# Altium PCB Attempt1-ADC.PcbDoc (part 1 of 2)
Units mil, origin at the board's own origin, x right, y up, seen from the top; angles counter-clockwise.
Board outline 2118.52 x 1463.27 mil, 4 copper layers (Top Layer, GND Layer 2, PWR Layer 3, Bottom Layer), stack 65.52 mil thick; 32 components, 24 nets, 127 pads, 323 vias.
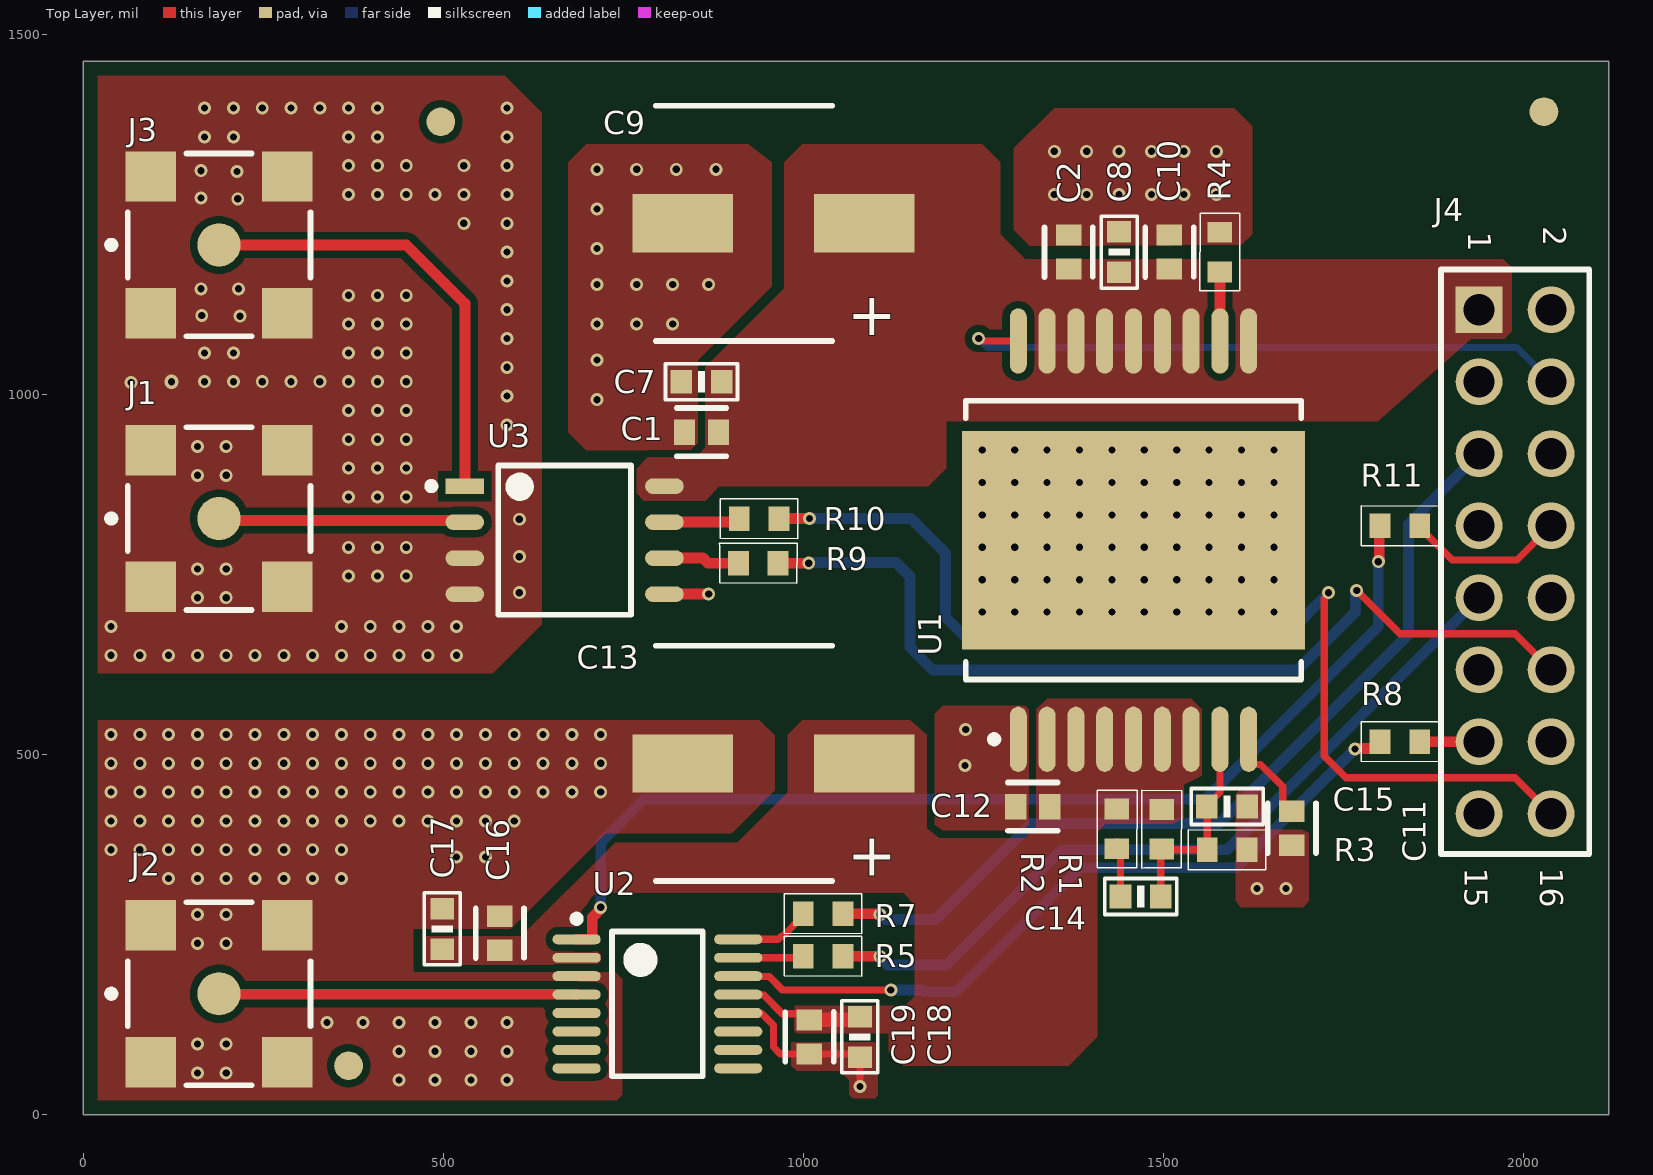
[diagram p0: Top Layer view]
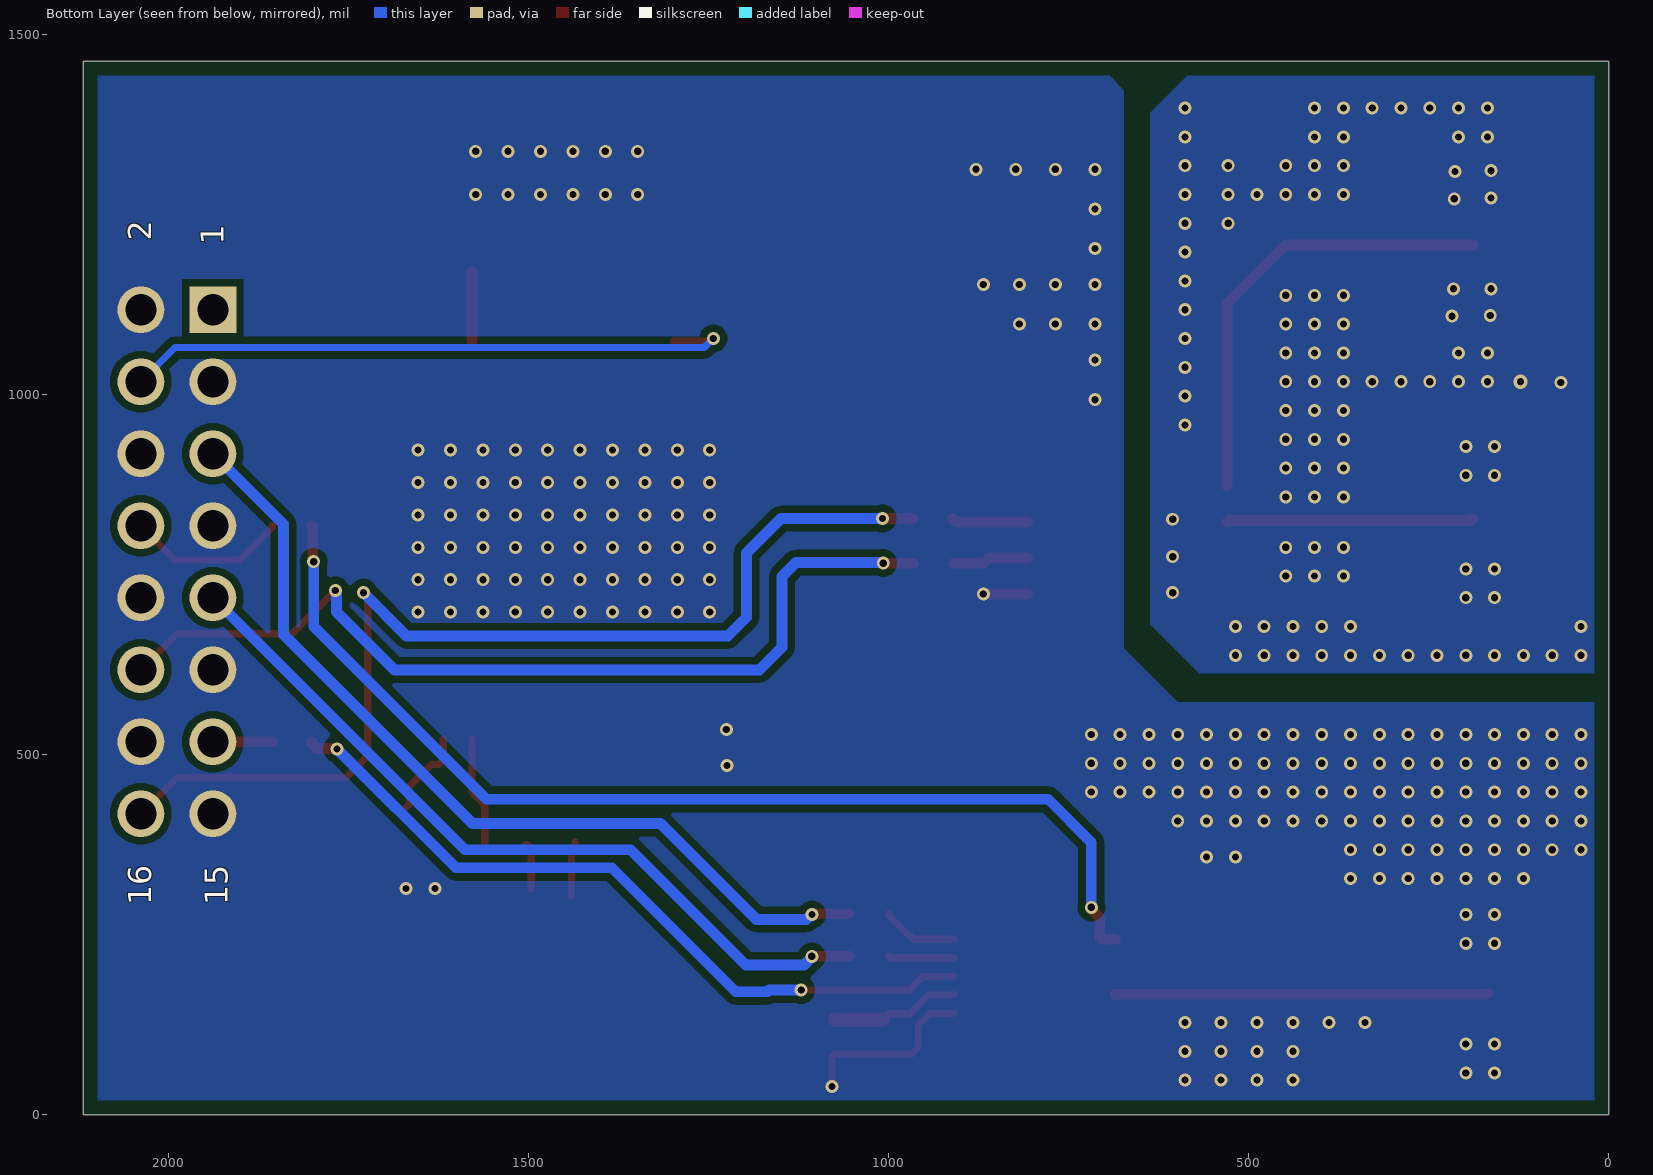
[diagram p1: Bottom Layer view, seen from below]
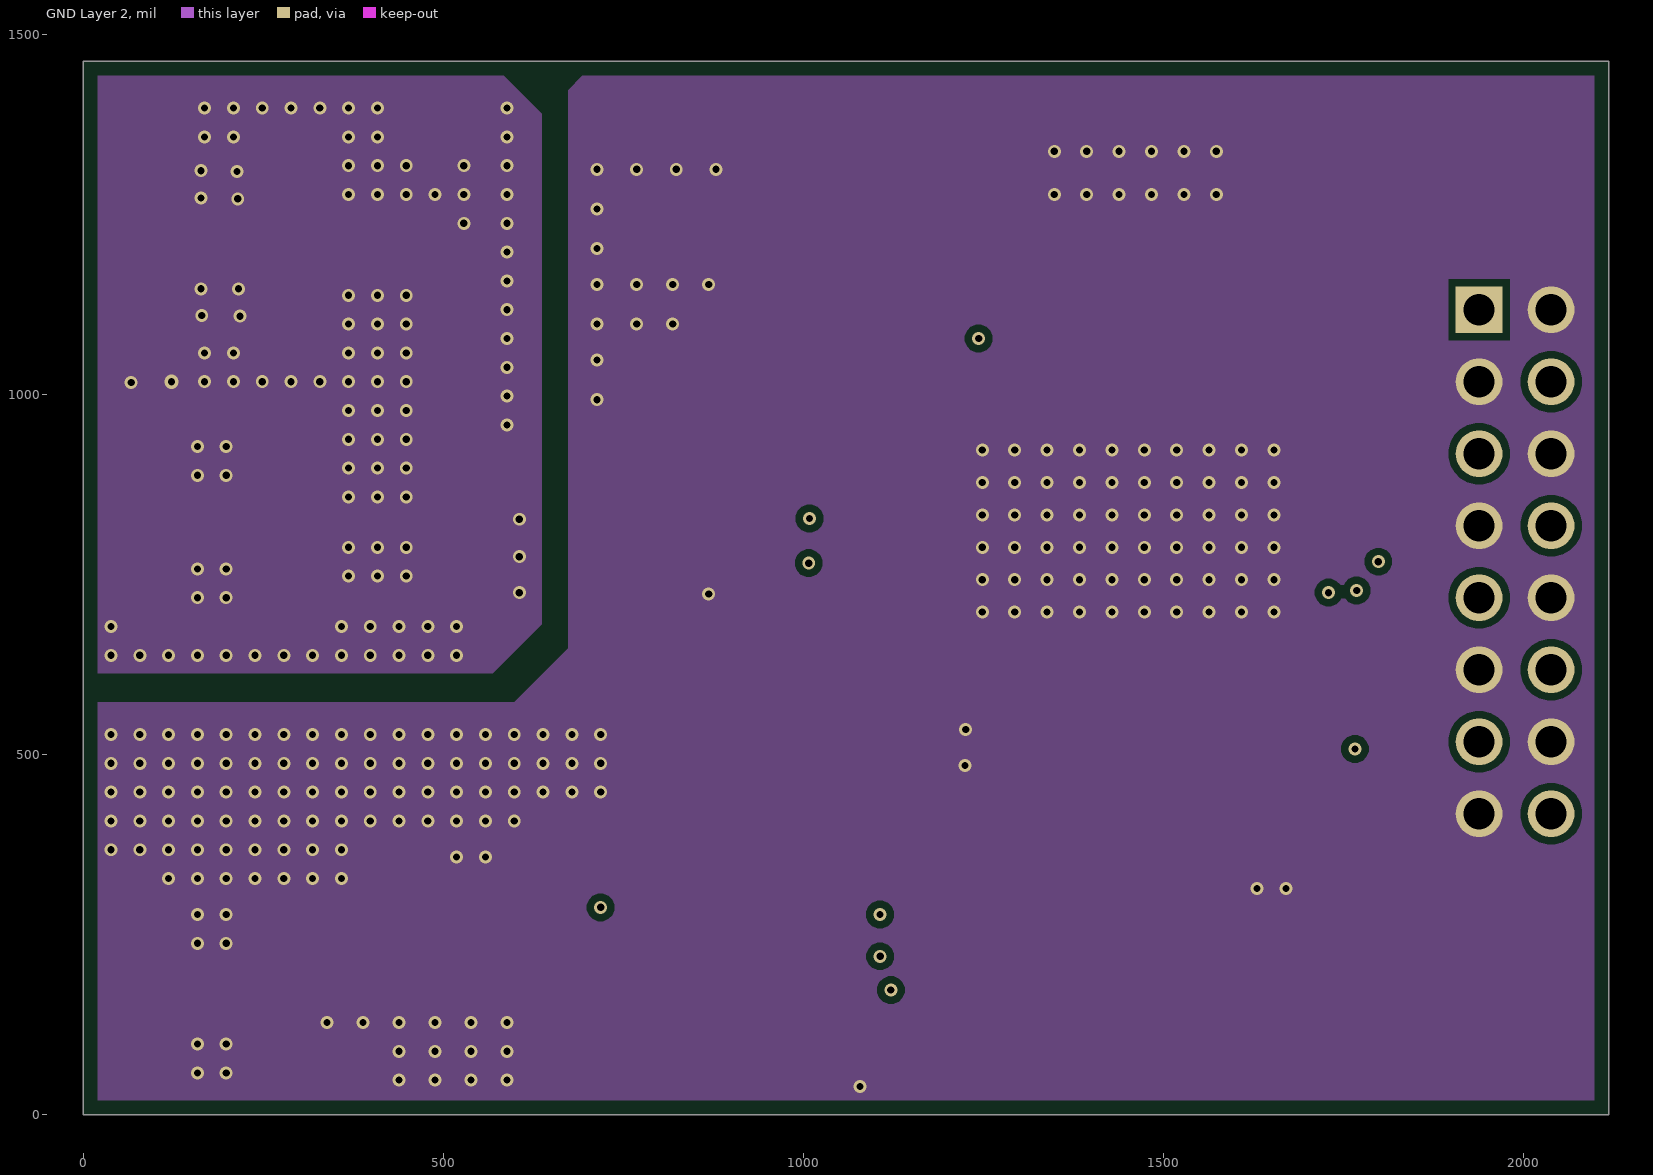
[diagram p2: GND Layer 2]
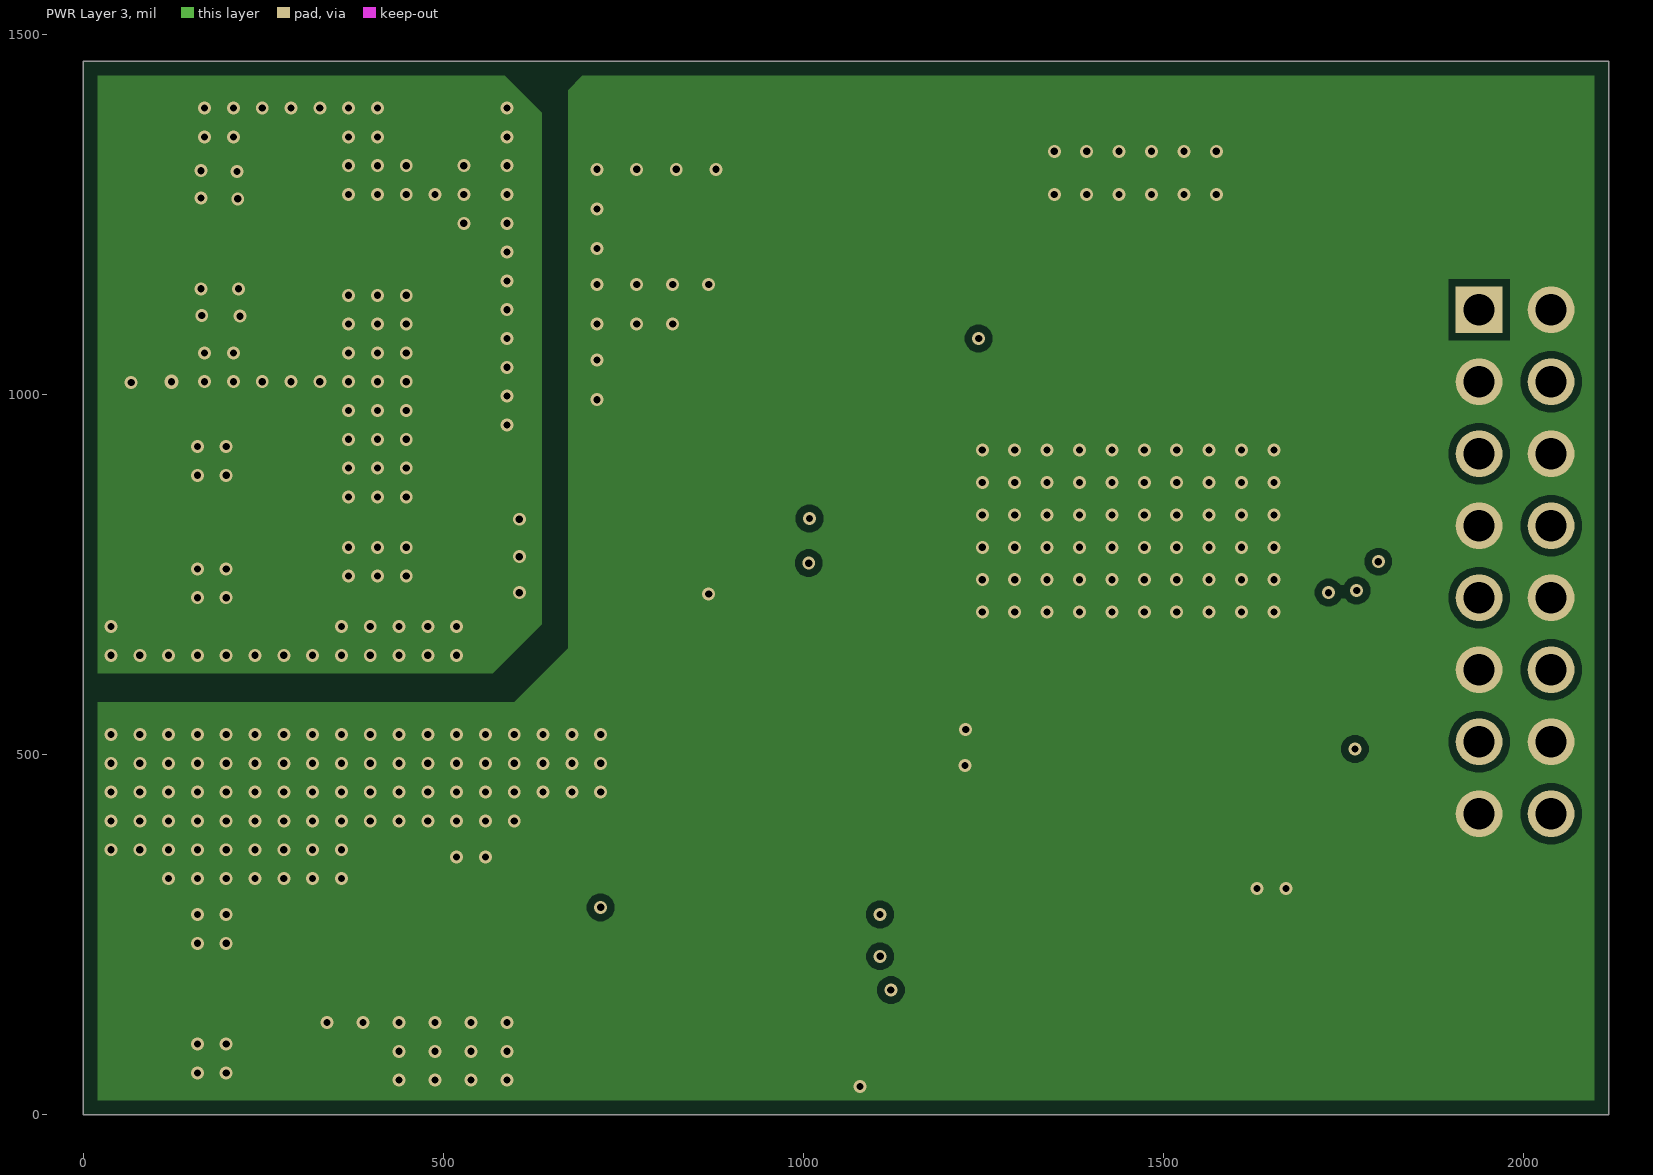
[diagram p3: PWR Layer 3]
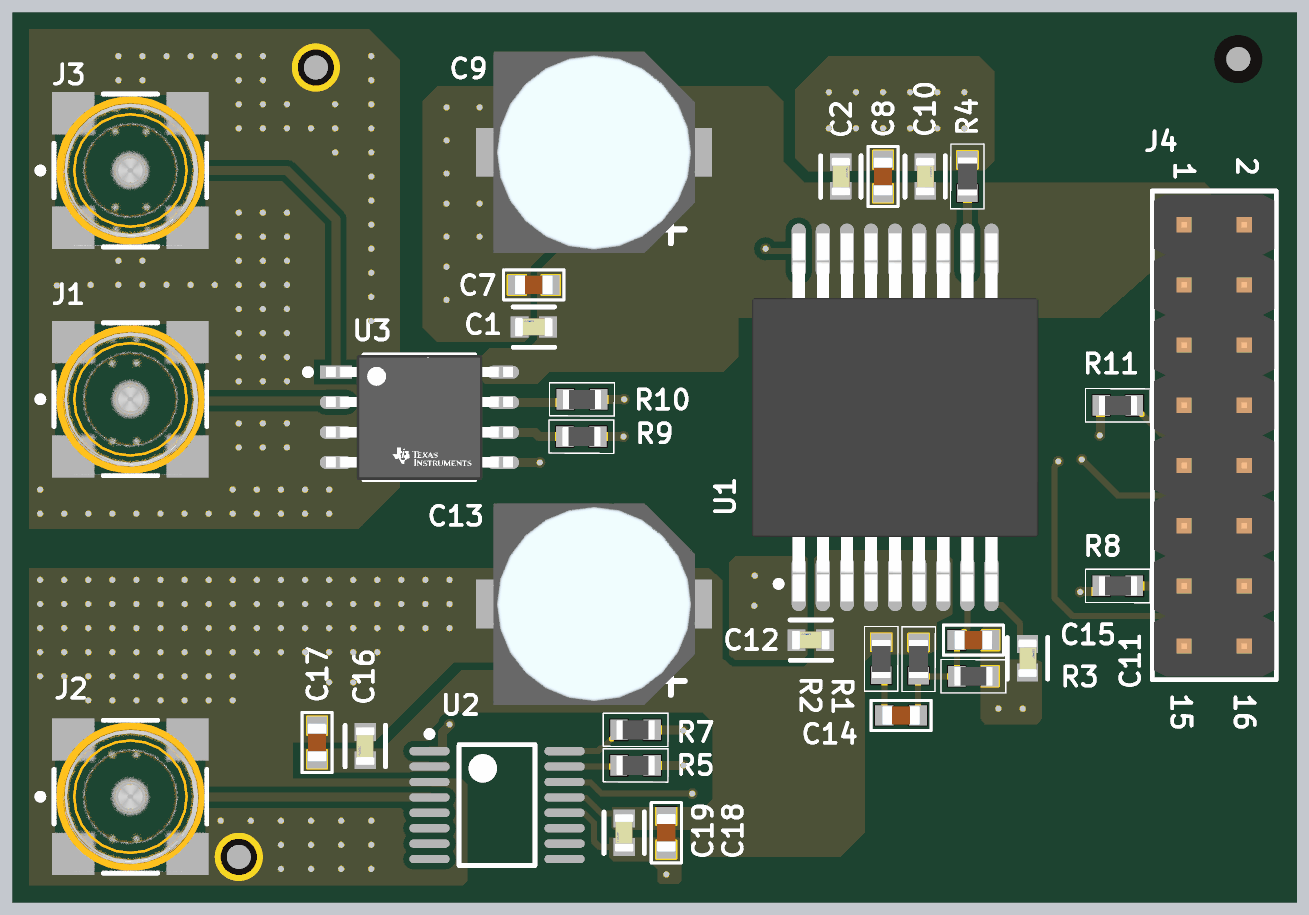
[diagram p5: 3D render of the assembled board from above, using the file's embedded part models]

## Layer stack, top to bottom
Top Solder: solder mask 0.4, Solder Resist, Dk 3.5
Top Layer: signal copper 1.378
Dielectric 2: prepreg 8.2835, PP-006, Dk 4.1
GND Layer 2: signal copper 0.5984
Dielectric 1: dielectric 45, FR-4, Dk 4.8
PWR Layer 3: signal copper 0.5984
Dielectric 3: prepreg 8.2835, PP-006, Dk 4.1
Bottom Layer: signal copper 1.378
Bottom Solder: solder mask 0.4, Solder Resist, Dk 3.5

## Board outline
0,0 2118.52,0 2118.52,1463.27 0,1463.27

## Design rules (kind name [scope] priority, off if disabled: settings)
BoardOutlineClearance [All] p1: gap=20 ignorepadtopadclearanceinfootprint=FALSE
Clearance [All] p1: gap=10 ignorepadtopadclearanceinfootprint=TRUE except(0: Arc-Hole Track-Hole SMDPad-Hole THPad-Hole Via-Hole Fill-Hole Poly-Hole Region-Hole Text-Hole)
ComponentClearance [All] p1: gap=10 collisioncheckmode=3 verticalgap=78.74 showdistances=FALSE checkcomponentboundary=TRUE
Creepage [All] p1: checkdistance=78.74
HoleSize [All] p1: absolutevalues=TRUE maxlimit=90000 minlimit=10 maxpercent=80.000 minpercent=20.000
MinimumSolderMaskSliver [All] p1: minsoldermaskwidth=3.5
PlaneConnect [All] p1: planeconnectstyle=Direct reliefexpansion=20 reliefentries=4 reliefconductorwidth=10 reliefairgap=10
PolygonConnect [All] p1: connectstyle=Direct reliefconductorwidth=10 reliefentries=4 polygonreliefangle="90 Angle" airgapwidth=10
RoutingVias [All] p1: holewidth=30 width=50 viastyle="Through Hole" minholewidth=30 minwidth=50 maxholewidth=30 maxwidth=50
SilkToSolderMaskClearance [IsPad] p1: minsilkscreentomaskgap=4.4 clearancetoexposedcopper=TRUE
SolderMaskExpansion [isvia] p1: expansion=4 istentingtop=TRUE
UnRoutedNet [All] p1: checkbadconnections=TRUE
Width [All] p1: maxlimit=50 minlimit=10 preferedwidth=10
24 further rules are at their usual default settings.

## Components (designator, comment, footprint, x,y, rotation, side; value= is the part's Value field where it differs from the comment)
C1 "0.10 μF" FP-C0603C-CF-MFG 858.52,948.27 r0 top
C2 "0.10 μF" FP-C0603C-CF-MFG 1368.52,1198.27 r270 top
C7 "10uF" CAPC1608X90N 858.52,1018.27 r180 top
C8 "10uF" CAPC1608X90N 1438.52,1198.27 r90 top
C9 "220uF/25V" CAP_AE830X1050N 958.52,1238.27 r180 top
C10 "0.10 μF" FP-C0603C-CF-MFG 1508.52,1198.27 r270 top
C11 "0.10 μF" FP-C0603C-CF-MFG 1678.52,398.27 r270 top
C12 "0.10 μF" FP-C0603C-CF-MFG 1318.52,428.27 r0 top
C13 "220uF/25V" CAP_AE830X1050N 958.52,488.27 r180 top
C14 "4.7nF" CAPC1608X90N 1468.52,303.27 r0 top
C15 "100pF" CAPC1608X90N 1588.52,428.27 r0 top
C16 "0.10 μF" FP-C0603C-CF-MFG 578.52,252.32 r90 top
C17 "1uF" CAPC1608X90N 498.52,258.27 r90 top
C18 "1uF" CAPC1608X90N 1078.52,108.27 r90 top
C19 "0.10 μF" FP-C0603C-CF-MFG 1008.52,108.27 r90 top
J1 "73251-1350" FP-73251-1350-MFG 188.52,828.27 r0 top
J2 "73251-1350" FP-73251-1350-MFG 188.52,168.27 r0 top
J3 "73251-1350" FP-73251-1350-MFG 188.52,1208.27 r0 top
J4 "61301621121" 61301621121 1988.52,768.27 r270 top
R1 "4.32K" RESC1608X55N 1497.52,396.83 r90 top
R2 "2.67K" RESC1608X55N 1435.52,397.27 r90 top
R3 "806R" RESC1608X55N 1588.52,368.27 r180 top
R4 "511R" RESC1608X55N 1578.52,1198.27 r270 top
R5 "22R" RESC1608X55N 1027.52,220.27 r0 top
R7 "22R" RESC1608X55N 1027.52,279.27 r0 top
R8 "22R" RESC1608X55N 1828.52,518.27 r0 top
R9 "22R" RESC1608X55N 937.52,766.27 r0 top
R10 "22R" RESC1608X55N 938.52,828.27 r0 top
R11 "22R" RESC1608X55N 1828.52,818.27 r180 top
U1 "ISL75051ASEHVFE" CFP102P1520X310-18AN 1458.52,798.27 r90 top
U2 "ADC128S102CIMTX" MTC16_N 797.37,154.29 r0 top
U3 "AMC1203BPSA" FP-PSA0008A-IPC_C 668.52,798.27 r0 top

## Footprints (in the part's own frame and the unit in brackets; to place one, negate y for a bottom-side part, rotate by r counter-clockwise, add the part's x,y. Pads: shape width x height; smd on the part's side, far side on the other; paste and mask are expansions set on the pad)
61301621121 [mm] "Pin Header, pitch 2.54 mm, THT, Vertical, dual row, 16p"
  rect 1.65x1.65 hole 1.1: 1(-8.89,-1.27)
  round 1.65 hole 1.1: 2(-8.89,1.27) 3(-6.35,-1.27) 4(-6.35,1.27) 5(-3.81,-1.27) 6(-3.81,1.27) 7(-1.27,-1.27) 8(-1.27,1.27) 9(1.27,-1.27) 10(1.27,1.27) 11(3.81,-1.27) 12(3.81,1.27) 13(6.35,-1.27) 14(6.35,1.27) 15(8.89,-1.27) 16(8.89,1.27)
  silkscreen extent -10.31,-2.62 10.31,2.62, body extent -10.16,-2.54 10.16,2.54, height 8.59
CAP_AE830X1050N [mm]
  rect 3.55x2.05 smd: 1(-3.2,0) 2(3.2,0)
  silkscreen extent -2.07,-4.15 4.15,4.15, body extent -4.25,-4.25 4.25,4.25, height 10.5
CAPC1608X90N [mil]
  rect 30x33 smd mask+2: 1(-28,0) 2(28,0)
  silkscreen extent -50,-25 50,25, body extent -31,-16 31,16, height 35
CFP102P1520X310-18AN [mm]
  oval 2.3x0.6 smd: 1(-7.025,4.064) 2(-7.025,3.048) 3(-7.025,2.032) 4(-7.025,1.016) 5(-7.025,0) 6(-7.025,-1.016) 7(-7.025,-2.032) 8(-7.025,-3.048) 9(-7.025,-4.064) 10(7.025,-4.064) 11(7.025,-3.048) 12(7.025,-2.032) 13(7.025,-1.016) 14(7.025,0) 15(7.025,1.016) 16(7.025,2.032) 17(7.025,3.048) 18(7.025,4.064)
  rect 7.7x12.09 smd paste-5.969: EP(0,0)
  silkscreen extent -7.15,-5.92 4.91,5.92, body extent -7.77,-6.04 7.77,6.04, height 3.1
FP-73251-1350-MFG [mil]
  round 60 smd paste+0 mask+0: 1(0,0)
  rect 70x70 smd paste+0 mask+0: 2(-95,95) 3(95,95) 4(-95,-95) 5(95,-95)
  silkscreen extent -155,-127 127,127, body extent -125,-125 125,125, height 380
FP-C0603C-CF-MFG [mm]
  rect 0.75x0.9 smd paste+0 mask+0: 1(-0.6,0) 2(0.6,0)
  silkscreen extent -0.87,-0.85 0.88,0.85, body extent -0.8,-0.4 0.8,0.4, height 0.87
FP-PSA0008A-IPC_C [mil]
  rect 53.76x21.49 smd paste+0 mask+0: 1(-138.6,75)
  rrect100% 53.76x21.49 smd paste+0 mask+0: 2(-138.6,25) 3(-138.6,-25) 4(-138.6,-75) 5(138.6,-75) 6(138.6,-25) 7(138.6,25) 8(138.6,75)
  silkscreen extent -190,-104 92,104, body extent -156,-104 156,104, height 79
MTC16_N [mm] "TSOP, 16-Leads, Body 5x4.4mm, Pitch 0.65mm, IPC Medium Density"
  oval 1.7x0.35 smd: 1(-2.85,2.275) 2(-2.85,1.625) 3(-2.85,0.975) 4(-2.85,0.325) 5(-2.85,-0.325) 6(-2.85,-0.975) 7(-2.85,-1.625) 8(-2.85,-2.275) 9(2.85,-2.275) 10(2.85,-1.625) 11(2.85,-0.975) 12(2.85,-0.325) 13(2.85,0.325) 14(2.85,0.975) 15(2.85,1.625) 16(2.85,2.275)
  silkscreen extent -2.97,-2.55 1.6,3.12, body extent -2.25,-2.55 2.25,2.55, height 1.1
RESC1608X55N [mil]
  rect 29x34 smd mask+2: 1(-27.56,0) 2(27.56,0)
  silkscreen extent -54,-28 54,28, body extent -31,-16 31,16, height 22

## Part data
C1 C2 C10 C11 C12 C16 C19: library part CMP-2006-03056-2, "CAP CER 0.1UF 50V 5% X7R 0603", Manufacturer=KEMET, Manufacturer Part Number=C0603C104J5RACTU, Package=C0603C-CF, Temperature="-55°C to +125°C", Temperature Characteristic=X7R, Temperature Coefficient=30ppm/°C, Temperature Range High=+125°C, Temperature Range Low=-55°C, Tolerance=0.05, Voltage Rating="50 V", Automotive=Yes, Automotive Grade="Grade 1", Capacitance="0.10 μF", Category=Cap, ComponentLink2Description=Datasheet, ComponentLink2URL=https://api.kemet.com/component-edge/download/datasheet/C0603C100J5GACAUTO.pdf, Device Class L1="Passive Components", Device Class L2=Capacitors, Device Class L3="Ceramic Capacitors", Digikey Description="CAP CER 0.1UF 50V 5% X7R 0603", Height=0.87mm, Lead Free=Yes, Material=Ceramic, Mouser Description="Multilayer Ceramic Capacitors MLCC - SMD/SMT 50volts 0.1uF X7R 5%", Octopart=https://octopart.com/c0603c104j5ractu-kemet-10440638, RoHS=TRUE
C7 C8: library part "CAP CER 10UF 25V X5R 0603", "CAP CER 10UF 25V X5R 0603", Manufacturer="Murata Electronics", Manufacturer Part Number=GRM188R61E106KA73D, Package=0603, Supplier Part Number 1=490-18214-1-ND, Tolerance=±10%, Voltage - Rated=25V, ComponentLink1Description="New link", Height=1mm, Supplier 1=Digi-Key
C9 C13: library part "CAP ALUM 220UF 20% 25V SMD", "CAP ALUM 220UF 20% 25V SMD", Manufacturer="United Chemi-Con", Manufacturer Part Number=EMZA250ADA221MHA0G, Supplier Part Number 1=565-2550-1-ND, Tolerance=±20%, ComponentLink1Description="New link", Height=10.5mm, Supplier 1=Digi-Key
C14: library part "CAP CER 4700PF 50V C0G 0603", "CAP CER 4700PF 50V C0G 0603", Manufacturer="TDK Corporation", Manufacturer Part Number=CGA3E2C0G1H472J080AA, Package=0603, Supplier Part Number 1=445-6912-1-ND, Tolerance=5%, Voltage - Rated=50V, ComponentLink1Description="New link", Height=0.9mm, Supplier 1=Digi-Key
C15: library part "CAP CER 100PF 50V C0G/NP0 0603", "CAP CER 100PF 50V C0G/NP0 0603", Manufacturer="KYOCERA AVX", Manufacturer Part Number=06035A101FAT2A, Package=0603, Supplier Part Number 1=478-6202-1-ND, Tolerance=1%, Voltage - Rated=50V, ComponentLink1Description="New link", Height=0.9mm, Supplier 1=Digi-Key
C17 C18: library part "CAP CER 1UF 25V X7R 0603", "CAP CER 1UF 25V X7R 0603", Manufacturer="Murata Electronics", Manufacturer Part Number=GCM188R71E105KA64D, Package=0603, Supplier Part Number 1=490-10673-1-ND, Tolerance=±10%, Voltage - Rated=25V, ComponentLink1Description="New link", Height=0.9mm, Supplier 1=Digi-Key
J1 J2 J3: library part CMP-04764-000006-1, "CONN SMA JACK STR 50 OHM SMD", Frequency=18GHz, Manufacturer=Molex, Temperature="-65°C to +165°C", Temperature Range High=+165°C, Temperature Range Low=-65°C, Voltage Rating=500V, Automotive=No, Category=Conn, ComponentLink2Description=Datasheet, ComponentLink2URL=https://www.molex.com/pdm_docs/sd/732511350_sd.pdf, Conn Orientation=Straight, Contact Material=Gold, Device Class L1=Connectors, Device Class L2="RF / Coaxial Connectors", Device Class L3=unset, Digikey Description="CONN SMA JACK STR 50 OHM SMD", Footprint Url=https://forum.upverter.com/uploads/default/original/3X/d/a/daeafa2ce4908d4fc4e49f0b17d7d2c986fce444.pdf, Height=9.655mm, Impedance=50Ω, Is Female=yes, Lead Free=Yes, Manufacturer Part Number=73251-1350, Mouser Description="RF Connectors / Coaxial Connectors SMA ST PCB-JCK STD SMT", Number Of Contacts=1, Octopart=https://octopart.com/73251-1350-molex-5414390, Package=73251-1350, RoHS=TRUE, Shielding=true, Standoff Height=0.41mm
J4: library part CMP-1502-01097-1, "THT Vertical Pin Header WR-PHD, Pitch 2.54 mm, Dual Row, 16 pins", Contact Resistance=20mOhm, Manufacturer="Wurth Elektronik", Operating Temperature=-40to105degC, Rated Current=3A, Withstanding Voltage=500VAC, Working Voltage=250VAC, Datasheet URL=https://katalog.we-online.de/em/datasheet/6130xx21121.pdf, Gender=Male, Manufacturer URL=http://www.we-online.de, Mounting Technology=THT, Orientation=Vertical, Package Reference=61301621121, Packaging=Bag, Part Number=61301621121, Pin Number=16, Pitch=2.54mm, Publisher=WurthElektronik, Row Number=Dual
R1: library part "RES SMD 4.32K OHM 0.5% 1/5W 0603", "RES SMD 4.32K OHM 0.5% 1/5W 0603", Manufacturer="Panasonic Electronic Components", Manufacturer Part Number=ERJ-PB3D4321V, Package=0603, Supplier Part Number 1=P20355CT-ND, Tolerance=0.5%, Height=0.55mm, Supplier 1=Digi-Key
R2: library part "RES SMD 2.67KOHM 0.5% 1/10W 0603", "RES SMD 2.67KOHM 0.5% 1/10W 0603", Manufacturer=Yageo, Manufacturer Part Number=RT0603DRD072K67L, Package=0603, Supplier Part Number 1=311-2.67KDCT-ND, Tolerance=0.5%, Height=0.55mm, Supplier 1=Digi-Key
R3: library part "RES SMD 806 OHM 0.5% 1/10W 0603", "RES SMD 806 OHM 0.5% 1/10W 0603", Manufacturer=Yageo, Manufacturer Part Number=RT0603DRD0762KL, Package=0603, Supplier Part Number 1=311-806DCT-ND, Tolerance=0.5%, Height=0.55mm, Supplier 1=Digi-Key
R4: library part "RES SMD 511 OHM 1% 1/10W 0603", "RES SMD 511 OHM 1% 1/10W 0603", Manufacturer="Panasonic Electronic Components", Manufacturer Part Number=ERJ-3EKF5110V, Package=0603, Supplier Part Number 1=P511HCT-ND, Tolerance=0.5%, Height=0.55mm, Supplier 1=Digi-Key
R5 R7 R8 R9 R10 R11: library part "RES SMD 22 OHM 0.5% 1/10W 0603", "RES SMD 22 OHM 0.5% 1/10W 0603", Manufacturer=Yageo, Manufacturer Part Number=RT0603DRD0722RL, Package=0603, Supplier Part Number 1=13-RT0603DRD0722RLCT-ND, Tolerance=0.5%, Height=0.55mm, Supplier 1=Digi-Key
U1: "Voltage regulator, linear, variable, 3 A, CFP-18 exposed pad, class V", EM Part Number=ISL75051ASEHFE/PROTO, FM (SMD) Part Number=5962R1121203VYC, Input Voltage High=6V, Input Voltage Low=2.2V, Manufacturer="Renesas / Intersil", Output Current Max=3A, Output Voltage="0.8 - 5.0V", Package="CFP-18 (exposed pad)", ComponentLink1Description="Datasheet - Manufacturer", ComponentLink1URL=https://www.renesas.com/us/en/www/doc/datasheet/isl75051aseh-3051aseh.pdf, ComponentLink2Description="Datasheet - Mil Spec", ComponentLink2URL=https://landandmaritimeapps.dla.mil/downloads/milspec/smd/11212.pdf, Device Class=V, Distributor=Avnet, Lead Form=Yes, Manufacturer Part Number=ISL75051ASEHVFE, Mass=1.07g, Mount Type=SMT, SEL=86.3MeV*cm2/mg, Supplier 1="Renesas / Intersil", Supplier Part Number 1=ISL75051ASEHVFE, TID="50krad (LDR), 100krad (HDR)"
U2: library part CMP-0054-00337-2, "8-Channel, 500 kSPS to 1 MSPS, 12-Bit A/D Converter, 16-pin TSSOP", Manufacturer="National Semiconductor", PackageTopMarking=NSUZXYTT*128S102*CIMT, PowerWise=Y, Code_JEDEC=MO-153-AB, ComponentLink1Description="ADC128S102 Datasheet", ComponentLink1URL=http://www.national.com/ds/AD/ADC128S102.pdf, ComponentLink2Description="ADC128S102 Web Page", ComponentLink2URL=http://www.national.com/pf/AD/ADC128S102.html, ComponentLink3Description="MTC16 Package Page", ComponentLink3URL=http://www.national.com/packaging/folders/mtc16.html, CompType="ADC IC", DatasheetVersion=Jul-2009, PackageDescription="Molded TSSOP, Jedec, 5 x 4.4 x 0.9mm Body, 16 Lead, 0.65mm Pitch", PackageReference=MTC16, PackageVersion="revD, Jun-2003", PinCount=16, RevisionNote="Component URLs added", RoHS=N
U3: library part CMP-04860-000036-1, "IC ADC 16BIT SIGMA-DELTA 8SOP", Case/Package=SOP, Max Operating Temperature=105°C, Max Power Dissipation=110mW, Max Supply Voltage=5.5V, Min Operating Temperature=-40°C, Min Supply Voltage=4.5V, Operating Supply Voltage=5V, Package Quantity=95, Power Consumption=80mW, Contact Plating=Gold, Differential Nonlinearity=1LSB, Input Type=DIFFERENTIAL, Integral Nonlinearity (INL)=6LSB, Interface=Serial, Lead Free="Lead Free", Mount="Surface Mount", Number Of A/D Converters=1, Number of Analog Inputs=1, Number of Bits=16, Number of Channels=1, Number of Converters=1, Number of Elements=1, Number Of Inputs=1, Number of Pins=8, Packaging=Rail/Tube, Polarity=Bipolar, Power Dissipation=80mW, Resolution=16b, RoHS Compliant=Yes, Sampling Rate=40KS/s, Signal to Noise Ratio (SNR)=85dB, Supply Type=Analog

## Free pads (board coordinates)
  round 40 smd mask+20: 0(496.52,1379.27) 48(368.52,68.27) 49(2028.52,1393.27)

## Via types
v1: diameter 18, hole 10, Top Layer to Bottom Layer, tented both sides, 322 vias
v2: diameter 20, hole 10, Top Layer to Bottom Layer, tented both sides, 1 vias

## Nets (pads, with @x,y where several pads share a name; then routed paths per layer and width w, separated by ;. In a path a pad name is that pad's centre, name@x,y a point inside that pad or via, vN(x,y) a via of type N, cw(c..) or ccw(c..) an arc to the next point about the centre after c; other vN are vias at no path point)
3V3: C12.2 C13.1 C16.1 C17.1 C18.2 C19.2 R1.2 R2.2 U1.2 U1.3 U1.4 U1.5 U1.6 U1.7 U2.2 U2.13 | length 185.3
  Top Layer w10: U2.13@909.58,167.08 910.3,166.36 944.93,166.36 970.77,140.52 999.9,140.52 C19.2@1008.52,131.89 ; C18.2@1074.15,131.89 C18.2@1078.52,136.27
  Top Layer w20: C19.2@1008.52,131.89 C18.2@1074.15,131.89
+5V: C1.2 C2.2 C7.1 C8.1 C9.1 C10.2 J4.1 U1.10 U1.12 U1.13 U1.14 U1.15 U1.16 U1.17 U3.8
+5V_AN: J3.1 U3.1 | length 628.7
  Top Layer w15: J3.1@188.52,1208.27 448.52,1208.27 529.93,1126.87 U3.1@529.93,873.27
AGND: J1.2 J1.3 J1.4 J1.5 J3.2 J3.3 J3.4 J3.5 U3.3 U3.4
  other v1: 38.52,638.27 78.52,638.27 118.52,638.27 158.52,638.27 198.52,638.27 238.52,638.27 278.52,638.27 318.52,638.27 358.52,638.27 398.52,638.27 438.52,638.27 478.52,638.27 518.52,638.27 38.52,678.27 358.52,678.27 398.52,678.27 438.52,678.27 478.52,678.27 518.52,678.27 158.52,718.27 198.52,718.27 605.52,725.27 368.52,748.27 408.52,748.27 448.52,748.27 158.52,758.27 198.52,758.27 605.52,775.27 368.52,788.27 408.52,788.27 448.52,788.27 605.52,827.27 368.52,858.27 408.52,858.27 448.52,858.27 158.52,888.27 198.52,888.27 368.52,898.27 408.52,898.27 448.52,898.27 158.52,928.27 198.52,928.27 368.52,938.27 408.52,938.27 448.52,938.27 588.52,958.27 368.52,978.27 408.52,978.27 448.52,978.27 588.52,998.27 66.52,1017.27 168.52,1018.27 208.52,1018.27 248.52,1018.27 288.52,1018.27 328.52,1018.27 368.52,1018.27 408.52,1018.27 448.52,1018.27 588.52,1038.27 168.52,1058.27 208.52,1058.27 368.52,1058.27 408.52,1058.27 448.52,1058.27 588.52,1078.27 368.52,1098.27 408.52,1098.27 448.52,1098.27 217.52,1109.27 164.52,1110.27 588.52,1118.27 368.52,1138.27 408.52,1138.27 448.52,1138.27 163.52,1147.27 215.52,1147.27 588.52,1158.27 588.52,1198.27 528.52,1238.27 588.52,1238.27 214.52,1272.27 163.52,1273.27 368.52,1278.27 408.52,1278.27 448.52,1278.27 488.52,1278.27 528.52,1278.27 588.52,1278.27 213.52,1310.27 163.52,1311.27 368.52,1318.27 408.52,1318.27 448.52,1318.27 528.52,1318.27 588.52,1318.27 168.52,1358.27 208.52,1358.27 368.52,1358.27 408.52,1358.27 588.52,1358.27 168.52,1398.27 208.52,1398.27 248.52,1398.27 288.52,1398.27 328.52,1398.27 368.52,1398.27 408.52,1398.27 588.52,1398.27
  other v2: 122.52,1018.27
CS: R11.2 U2.1 | length 1505.1
  Top Layer w15: U2.1@685.17,243.85 705,243.85 706.74,245.6 706.74,274.32 718.52,286.11 v1(718.52,288.27) ; v1(1798.52,768.27) 1799.74,769.49 1799.74,817.05 R11.2@1800.96,818.27
  Bottom Layer w15: v1(718.52,288.27) 718.52,378.27 778.52,438.27 1558.52,438.27 1798.52,678.27 v1(1798.52,768.27)
DIN: R8.1 U2.14 | length 1045.5
  Top Layer w10: U2.14@909.58,192.67 910.19,192.06 952.73,192.06 971.52,173.27 v1(1121.52,173.27)
  Top Layer w15: v1(1766.01,508.28) 1766.59,508.86 1793.96,508.86 1800.96,515.86 R8.1@1800.96,518.27
  Bottom Layer w15: v1(1121.52,173.27) 1166.26,173.27 1168.43,171.1 1212.36,171.1 1384.52,343.27 1601,343.27 v1(1766.01,508.28)
DOUT: J4.9 R5.2 | length 1099.9
  Top Layer w15: R5.2@1055.08,220.27 v1(1106.71,220.27)
  Bottom Layer w15: v1@1106.15,219.52 1117.4,208.27 1198.52,208.27 1358.52,368.27 1588.52,368.27 1748.52,528.27 J4.9@1938.52,718.27
GND: C1.1 C2.1 C7.2 C8.2 C9.2 C10.1 C11.2 C12.1 C13.2 C15.2 C16.2 C17.2 C18.1 C19.1 J2.2 J2.3 J2.4 J2.5 J4.2 J4.3 J4.6 J4.7 J4.10 J4.11 J4.14 J4.15 R3.1 R4.1 U1.1 U1.EP U2.3 U2.12 U3.5 | length 314.5
  Top Layer w10: U2.12@909.58,141.49 910.3,140.77 942.24,140.77 958.52,124.48 958.52,94.13 968,84.65 C19.1@1008.52,84.65 1074.15,84.65 C18.1@1078.52,80.27 v1(1078.52,39.27)
  Top Layer w15: U3.5@807.12,723.27 v1(868.52,723.27)
  other v1: 438.52,48.27 488.52,48.27 538.52,48.27 588.52,48.27 158.52,58.27 198.52,58.27 438.52,88.27 488.52,88.27 538.52,88.27 588.52,88.27 158.52,98.27 198.52,98.27 338.52,128.27 388.52,128.27 438.52,128.27 488.52,128.27 538.52,128.27 588.52,128.27 158.52,238.27 198.52,238.27 158.52,278.27 198.52,278.27 1629.94,314.61 1670.52,314.27 118.52,328.27 158.52,328.27 198.52,328.27 238.52,328.27 278.52,328.27 318.52,328.27 358.52,328.27 518.52,358.27 558.52,358.27 38.52,368.27 78.52,368.27 118.52,368.27 158.52,368.27 198.52,368.27 238.52,368.27 278.52,368.27 318.52,368.27 358.52,368.27 38.52,408.27 78.52,408.27 118.52,408.27 158.52,408.27 198.52,408.27 238.52,408.27 278.52,408.27 318.52,408.27 358.52,408.27 398.52,408.27 438.52,408.27 478.52,408.27 518.52,408.27 558.52,408.27 598.52,408.27 38.52,448.27 78.52,448.27 118.52,448.27 158.52,448.27 198.52,448.27 238.52,448.27 278.52,448.27 318.52,448.27 358.52,448.27 398.52,448.27 438.52,448.27 478.52,448.27 518.52,448.27 558.52,448.27 598.52,448.27 638.52,448.27 678.52,448.27 718.52,448.27 1224.52,485.27 38.52,488.27 78.52,488.27 118.52,488.27 158.52,488.27 198.52,488.27 238.52,488.27 278.52,488.27 318.52,488.27 358.52,488.27 398.52,488.27 438.52,488.27 478.52,488.27 518.52,488.27 558.52,488.27 598.52,488.27 638.52,488.27 678.52,488.27 718.52,488.27 38.52,528.27 78.52,528.27 118.52,528.27 158.52,528.27 198.52,528.27 238.52,528.27 278.52,528.27 318.52,528.27 358.52,528.27 398.52,528.27 438.52,528.27 478.52,528.27 518.52,528.27 558.52,528.27 598.52,528.27 638.52,528.27 678.52,528.27 718.52,528.27 1225.52,535.27 1248.52,698.27 1293.52,698.27 1338.52,698.27 1383.52,698.27 1428.52,698.27 1473.52,698.27 1518.52,698.27 1563.52,698.27 1608.52,698.27 1653.52,698.27 1248.52,743.27 1293.52,743.27 1338.52,743.27 1383.52,743.27 1428.52,743.27 1473.52,743.27 1518.52,743.27 1563.52,743.27 1608.52,743.27 1653.52,743.27 1248.52,788.27 1293.52,788.27 1338.52,788.27 1383.52,788.27 1428.52,788.27 1473.52,788.27 1518.52,788.27 1563.52,788.27 1608.52,788.27 1653.52,788.27 1248.52,833.27 1293.52,833.27 1338.52,833.27 1383.52,833.27 1428.52,833.27 1473.52,833.27 1518.52,833.27 1563.52,833.27 1608.52,833.27 1653.52,833.27 1248.52,878.27 1293.52,878.27 1338.52,878.27 1383.52,878.27 1428.52,878.27 1473.52,878.27 1518.52,878.27 1563.52,878.27 1608.52,878.27 1653.52,878.27 1248.52,923.27 1293.52,923.27 1338.52,923.27 1383.52,923.27 1428.52,923.27 1473.52,923.27 1518.52,923.27 1563.52,923.27 1608.52,923.27 1653.52,923.27 713.52,993.27 713.52,1048.27 713.52,1098.27 768.52,1098.27 818.52,1098.27 713.52,1153.27 768.52,1153.27 818.52,1153.27 868.52,1153.27 713.52,1203.27 713.52,1258.27 1348.52,1278.27 1393.52,1278.27 1438.52,1278.27 1483.52,1278.27 1528.52,1278.27 1573.52,1278.27 713.52,1313.27 768.52,1313.27 823.52,1313.27 878.52,1313.27 1348.52,1338.27 1393.52,1338.27 1438.52,1338.27 1483.52,1338.27 1528.52,1338.27 1573.52,1338.27
MCLK: J4.16 R10.2 | length 1485.6
  Top Layer w10: v1(1729.52,725.27) 1729.52,723.11 1723.52,717.11 1723.52,498.27 1753.54,468.25 1988.54,468.25 J4.16@2038.52,418.27
  Top Layer w15: R10.2@966.08,828.27 v1(1008.52,828.27)
  Bottom Layer w15: v1(1008.52,828.27) 1149.52,828.27 1197.52,780.27 1197.52,691.27 1223.52,665.27 1669.52,665.27 v1(1729.52,725.27)
MDAT: J4.12 R9.2 | length 1302.4
  Top Layer w10: v1(1768.52,728.27) 1828.5,668.29 1988.5,668.29 J4.12@2038.52,618.27
  Top Layer w15: R9.2@965.08,766.27 v1(1007.52,766.27)
  Bottom Layer w15: v1@1006.14,766.84 1010.22,766.84 1010.64,767.27 1128.61,767.27 1148.07,747.81 1148.07,649.53 1179.78,617.81 1686.35,617.81 1766.81,698.27 1766.81,725.75 1768.52,727.46 v1(1768.52,728.27)
NetC11_1: C11.1 U1.9 | length 132.4
  Top Layer w10: U1.9@1618.52,521.7 1618.52,493.08 1624.82,486.79 1635,486.79 1665.81,455.99 1665.81,431.66 1675.57,421.89 C11.1@1678.52,421.89
NetC14_1: C14.1 R2.1 | length 78.5
  Top Layer w10: R2.1@1435.52,379.71 R2.1@1435.52,369.71 1440.52,364.71 C14.1@1440.52,303.27
NetC14_2: C14.2 C15.1 R1.1 R3.2 U1.8 | length 287.2
  Top Layer w10: C14.2@1496.52,313.27 1496.52,369.77 1502.09,375.33 1503.96,375.33 1511.02,368.27 R3.2@1560.96,368.27 1560.96,427.83 C15.1@1560.52,428.27 1560.52,429.77 1578.52,447.77 U1.8@1578.52,521.7
NetJ1_1: J1.1 U3.2 | length 343.5
  Top Layer w15: J1.1@188.52,828.27 191.33,825.47 527.73,825.47 U3.2@529.93,823.27
NetJ2_1: J2.1 U2.4 | length 517.1
  Top Layer w15: J2.1@168.52,168.27 169.12,167.68 684.57,167.68 U2.4@685.17,167.08
NetJ4_5: J4.5 R7.2 | length 1244.3
  Top Layer w15: R7.2@1055.08,279.27 1104.71,279.27 1105.71,278.27 v1(1106.52,278.27)
  Bottom Layer w15: v1(1106.52,278.27) 1107.34,278.27 1114.34,271.27 1183.52,271.27 1316.9,404.65 1577.81,404.65 1840.44,667.27 1840.44,820.18 J4.5@1938.52,918.27
NetJ4_8: J4.8 R11.1 | length 223.2
  Top Layer w10: R11.1@1856.08,818.27 1856.08,815.77 1901.06,770.79 1991.04,770.79 J4.8@2038.52,818.27
NetJ4_13: J4.13 R8.2 | length 82.4
  Top Layer w15: R8.2@1856.08,518.27 J4.13@1938.52,518.27
NetR4_2: R4.2 U1.11 | length 95.9
  Top Layer w15: U1.11@1578.52,1074.85 R4.2@1578.52,1170.71
NetR5_1: R5.1 U2.15 | length 91.2
  Top Layer w10: U2.15@909.58,218.26 997.96,218.26 R5.1@999.96,220.27
NetR9_1: R9.1 U3.6 | length 105.7
  Top Layer w15: U3.6@807.12,773.27 860.52,773.27 867.52,766.27 R9.1@909.96,766.27
NetR10_1: R10.1 U3.7 | length 105.9
  Top Layer w15: U3.7@807.12,823.27 905.96,823.27 R10.1@910.96,828.27
PGOOD: J4.4 U1.18 | length 876.3
  Top Layer w10: v1(1243.52,1078.27) 1245.69,1078.27 1249.11,1074.85 U1.18@1298.52,1074.85
  Bottom Layer w10: v1(1243.52,1078.27) 1256.04,1065.75 1991.04,1065.75 J4.4@2038.52,1018.27
SCLK: R7.1 U2.16 | length 106.5
  Top Layer w10: U2.16@909.58,243.85 964.94,243.85 969.65,248.56 971.75,248.56 999.96,276.77 R7.1@999.96,279.27
pads on no net: U2.5 U2.6 U2.7 U2.8 U2.9 U2.10 U2.11

## Polygon pours and split planes (outlines as drawn)
+5V on Top Layer "Top Layer-+5V" (solid, pour order 25): 768.52,863.27 778.52,853.27 863.52,853.27 883.52,873.27 1173.52,873.27 1198.52,898.27 1198.52,963.27 1797.52,963.27 1927.86,1078.27 1973.52,1078.27 1983.52,1088.27 1983.52,1176.81 1972.07,1188.27 1308.52,1188.27 1273.52,1223.27 1273.52,1323.27 1248.52,1348.27 998.52,1348.27 973.52,1323.27 973.52,1148.27 863.52,1038.27 863.52,927.25 867.39,923.38 863.52,926.56 850.24,913.27 784.11,913.27 768.52,897.68
3V3 on Top Layer "3V3" (solid, pour order 2): 608.45,248.27 472.91,248.27 473.92,207.09 527.34,207.09 528.52,208.27 718.52,208.27 718.52,298.27 728.52,308.27 1138.52,308.27 1155,291.79 1155,164.75 1141.52,151.27 988.08,151.27 987.08,113.27 1118.52,113.27 1118.52,88.27 1138.52,68.27 1368.52,68.27 1408.52,108.27 1408.52,393.4 1419.78,404.65 1513.27,404.65 1528.52,412.27 1528.52,458.27 1553.52,470.77 1553.52,563.27 1538.52,578.27 1338.52,578.27 1323.52,563.27 1323.52,398.27 1306.52,384.27 1188.52,384.27 1171.52,398.27 1171.52,528.27 1148.52,548.27 998.52,548.27 978.52,528.27 978.52,448.27 908.52,378.27 738.45,378.27
GND on Top Layer "GND_L01_P024" (solid, pour order 24): 983.52,100.77 1098.85,100.77 1103.52,96.09 1103.52,27.23 1099.57,23.27 1068.52,23.27 1063.52,28.27 1063.52,48.27 1050.77,61.03 990.77,61.03 983.52,68.27
GND on Top Layer "GND" (solid, pour order 6): 1600.52,445.27 1608.52,453.27 1633.51,453.27 1633.67,453.43 1638.51,448.59 1638.51,403.56 1645.8,396.27 1692.78,396.27 1702.15,391.89 1702.15,297.27 1694.52,288.27 1607.51,288.27 1600.52,297.7
GND on Top Layer "GND" (solid, pour order 7): 1182.52,403.27 1193.52,395.27 1307.52,395.27 1313.52,401.27 1313.52,563.27 1308.52,568.27 1193.52,568.27 1182.52,557.27
GND on Top Layer "GND" (solid, pour order 1): 18.52,548.27 939.02,548.27 960.02,527.27 960.02,450.77 900.52,391.27 726.52,391.27 593.52,258.27 458.52,258.27 458.52,198.27 738.52,198.27 748.52,188.27 748.52,28.27 728.52,8.27 18.52,8.27
AGND on Top Layer "AGND" (solid, pour order 19): 17.84,1445.43 583.07,1445.43 636.52,1391.97 636.52,681.27 568.52,613.27 17.84,613.27
GND on Top Layer "GND" (solid, pour order 11): 673.52,948.27 698.52,923.27 843.52,923.27 853.52,933.27 853.52,1048.27 956.02,1150.77 956.02,1323.27 923.52,1348.27 698.52,1348.27 673.52,1323.27
GND on Top Layer "GND" (solid, pour order 9): 1292.52,1229.27 1315.07,1206.72 1608.52,1208.27 1623.52,1223.27 1623.52,1373.27 1598.52,1398.27 1348.52,1398.27 1292.52,1342.27
AGND on Top Layer "AGND" (solid, pour order 0): 8.52,1453.27 575.22,1453.27 636.52,1391.97 636.52,681.27 568.52,613.27 8.52,613.27
GND on GND Layer 2 "GND" (solid, pour order 15): 673.52,1423.27 673.52,648.27 598.52,573.27 13.52,573.27 13.52,13.27 18.52,8.27 2098.52,8.27 2108.52,18.27 2108.52,1443.27 2098.52,1453.27 703.52,1453.27
AGND on GND Layer 2 "AGND" (solid, pour order 14): 11.7,1451.57 575.22,1451.57 636.52,1390.27 636.52,681.27 568.52,613.27 11.7,613.27
GND on PWR Layer 3 "GND" (solid, pour order 17): 703.52,1453.27 673.52,1423.27 673.52,648.27 598.52,573.27 13.52,573.27 13.52,13.27 18.52,8.27 2098.52,8.27 2108.52,18.27 2108.52,1443.27 2098.52,1453.27
AGND on PWR Layer 3 "AGND" (solid, pour order 16): 17.84,1445.43 17.84,613.27 568.52,613.27 636.52,681.27 636.52,1391.97 583.07,1445.43
AGND on Bottom Layer "AGND" (solid, pour order 20): 20.39,1442.88 585.62,1442.88 636.52,1391.97 636.52,681.27 568.52,613.27 20.39,613.27
GND on Bottom Layer "GND" (solid, pour order 18): 703.52,1453.27 673.52,1423.27 673.52,648.27 598.52,573.27 13.52,573.27 13.52,13.27 18.52,8.27 2098.52,8.27 2108.52,18.27 2108.52,1443.27 2098.52,1453.27

## Silkscreen, mask and mechanical layers (free items; w line width, h text height)
Board Shape:
  the board outline again, w15